# EAGLE board ESP8266-DS18B20-outside-lite (EAGLE 7.6.0)
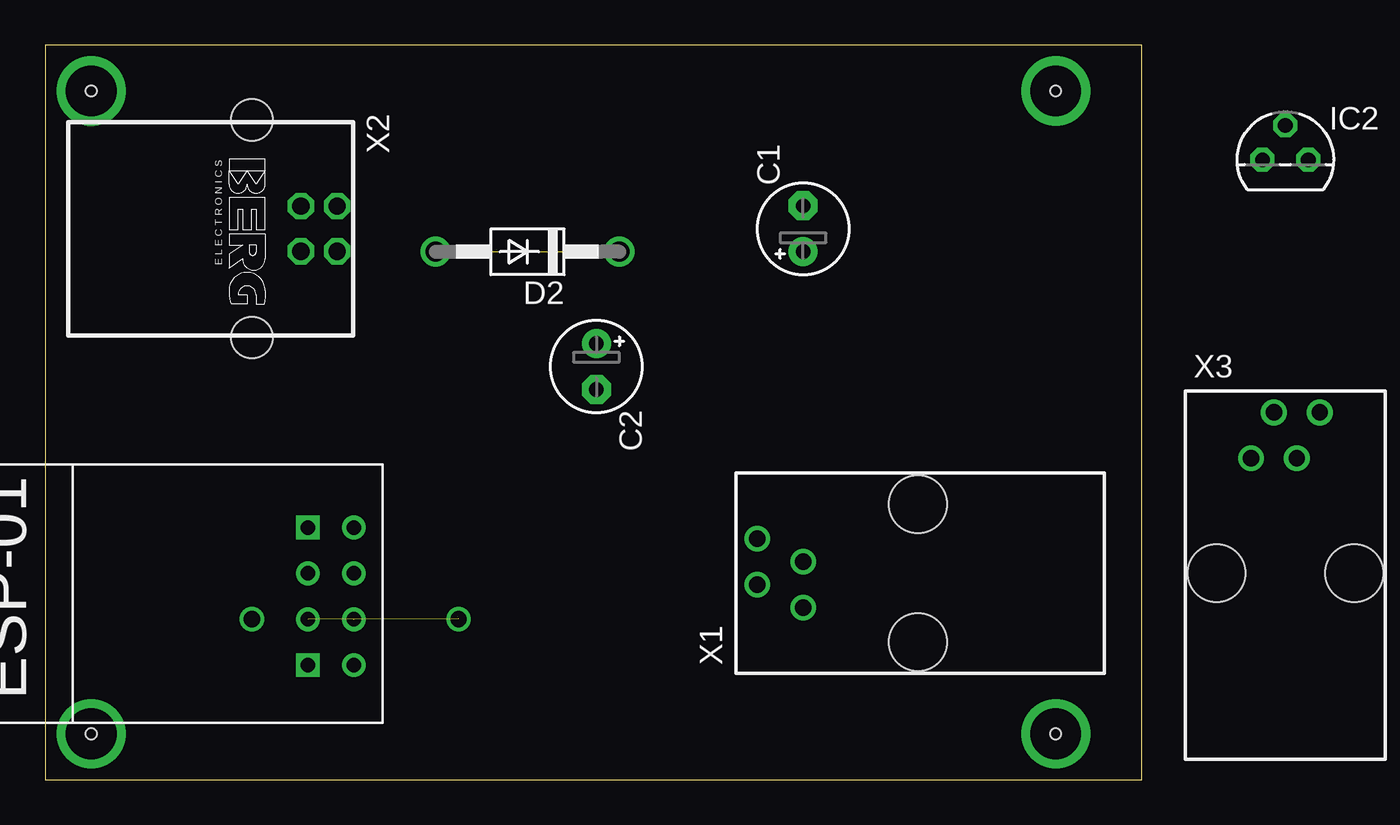
[diagram p0: board, top side]
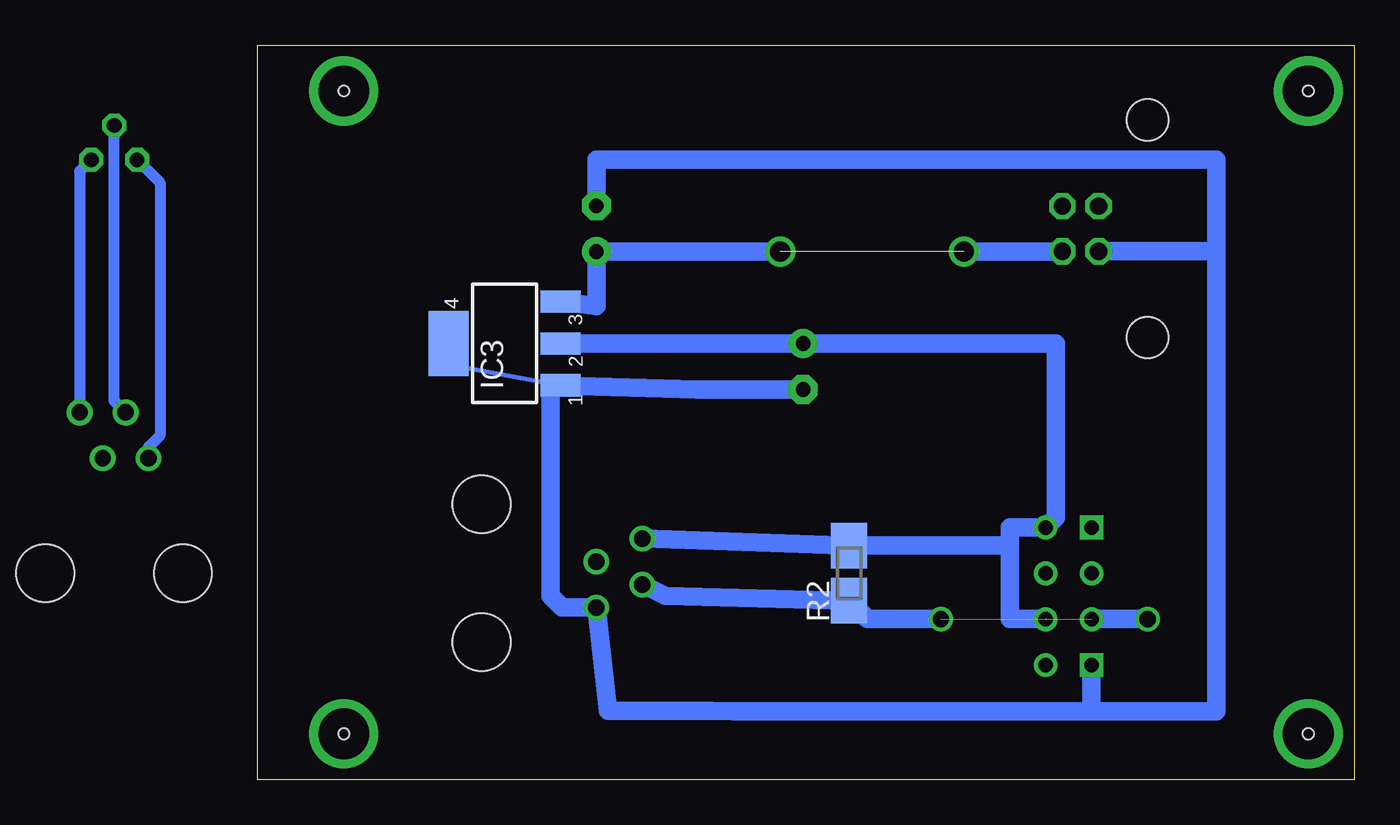
[diagram p1: board, bottom side, seen from below]

Size 60.63 x 40.63 mm. Coordinates in mm from the lower left corner, seen from the top.
Outline: 0,0 60.63,0 60.63,40.63 0,40.63 0,0
Copper layers (1*16): Top 0.035mm / dielectric 1.5mm / Bottom 0.035mm
Design rules "default": minimum track width 10mil, minimum drill 24mil, track to track 8mil, track to pad 8mil, pad to pad 8mil, via to via 8mil, smd to smd 8mil, copper to edge 40mil, drill to drill 8mil, minimum pad ring 10mil, minimum via ring 8mil, stop-mask expansion 4mil, vias tented up to drill 0mil, thermal gap 10mil
Holes 0.6 mm at 2.54,2.54 55.88,2.54 55.88,38.1 2.54,38.1

## Footprints (pad centres in the part's own frame; a part is rotated, then mirrored left to right if it is on the bottom)
E2,5-5 = drill 0.813 pad 1.6: + -1.27,0 | drill 0.813 pad 1.6 octagon: - 1.27,0
DO41-10 = drill 1.118: A 5.08,0; C -5.08,0
TO-92 = drill 0.813 pad 1.27 octagon: 1 -1.27,0; 2 0,1.905; 3 1.27,0
SOT223 = smd 1.219 x 2.235: 1 -2.311,-3.099; 2 0,-3.099; 3 2.311,-3.099 | smd 3.6 x 2.2: 4 0,3.099
SMK = smd 2.5 x 2: 1 1.524,0; 2 -1.524,0
ESP01 = drill 0.8: CH_PD -1.285,-8.178; GPIO0 1.255,-5.638; GPIO2 -1.285,-5.638; RST 1.255,-8.178; TX -3.825,-8.178; VCC 3.795,-8.178 | drill 0.8 square: GND -3.825,-5.638; RX 3.795,-5.638
14867 = drill 0.9 pad 1.422: 1 -1.905,6.35; 2 -0.635,8.89; 3 0.635,6.35; 4 1.905,8.89 | hole 3.2: -3.81,0; 3.81,0
PN61729 = drill 0.95 octagon: 1 1.25,4.71; 2 -1.25,4.71; 3 -1.25,2.71; 4 1.25,2.71 | hole 2.3: -6.02,0; 6.02,0

## Placement (x,y rotation side)
C1  100uf  [E2,5-5]  41.91,30.48 90 top
C2  100uF  [E2,5-5]  30.48,22.86 270 top
D2  1N4004  [DO41-10]  26.67,29.21 180 top
IC2  DS1820  [TO-92]  68.58,34.29 0 top  (outside the outline)
IC3  LM340S  [SOT223]  46.99,24.13 90 bottom
R2  [SMK]  27.94,11.43 90 bottom
U$1  ESP01  [ESP01]  8.89,10.16 90 top
X1  14867  [14867]  48.26,11.43 90 top
X2  [PN61729]  11.43,30.48 270 top
X3  14867  [14867]  68.58,11.43 0 top  (outside the outline)

## Library data of the parts
C1 C2 = rcl
D2 = diode
IC2 = DS1820
IC3 = linear
R2 = resistor-shunt; OC_FARNELL: unknown; OC_NEWARK: unknown
U$1 = esp8266modules
X1 X3 = con-4ucon; OC_FARNELL: unknown; OC_NEWARK: unknown
X2 = con-berg; OC_FARNELL: unknown; OC_NEWARK: unknown

## Nets
3V3: C2.+ IC3.2 R2.1 U$1.CH_PD U$1.VCC X1.4
5V: C1.+ D2.A D2.C IC3.3 X2.1
DQ: R2.2 U$1.GPIO2 X1.2
GND: C1.- C2.- IC3.1 IC3.4 U$1.GND X1.1 X2.4
P2_3V3: IC2.3 X3.4
P2_DQ: IC2.2 X3.2
P2_GND: IC2.1 X3.1

## Tracks (layer width: path | path; a pad name or v marks a point on that pad's centre or on a via)
3V3  (1 unrouted)
  Bottom 1.016: IC3.2 C2.+ 16.51,24.13 16.51,14.51 U$1.VCC 19.04,13.95 19.05,13.97 19.05,12.95 | 17.05,8.89 19.05,8.89 19.05,12.95 | X1.4 28.32,12.95 R2.1 19.05,12.95
5V  (1 unrouted)
  Bottom 1.016: D2.C C1.+ 41.91,26.19 IC3.3 | X2.1 16.16,29.21 D2.A
DQ  (1 unrouted)
  Bottom 1.016: U$1.GPIO2 14.51,8.89 11.43,8.89 | X1.2 38.1,10.16 R2.2 26.92,8.89 22.86,8.89
GND
  Bottom 0.254: 44.45,21.92 49.53,22.86 IC3.4
  Bottom 1.016: 7.62,29.23 X2.4 13.97,29.23 | 7.62,29.23 7.62,3.8 14.53,3.8 | C1.- 41.91,34.29 7.62,34.29 7.62,29.23 | 14.53,3.8 U$1.GND | 14.53,3.8 34.3,3.8 35.56,3.81 41.27,3.81 X1.1 43.81,9.52 44.45,10.16 44.45,21.92 IC3.1 36.35,21.59 C2.-
N$3  (via drill 0.9)
  other vias: 11.43,8.89
N$5  (via drill 0.9)
  other vias: 22.86,8.89
P2_3V3
  Bottom 0.61: IC2.3 70.48,33.65 X3.4
P2_DQ
  Bottom 0.61: X3.2 68.58,20.95 IC2.2
P2_GND
  Bottom 0.61: IC2.1 66.04,33.02 66.04,19.05 66.67,18.41 X3.1
S$2  (via drill 2.8)
  other vias: 55.88,38.1
S$3  (via drill 2.8)
  other vias: 2.54,38.1
S$4  (via drill 2.8)
  other vias: 2.54,2.54
S$5  (via drill 2.8)
  other vias: 55.88,2.54